# EAGLE board SparkFun_Temperatre_Sensor-STTS22H (EAGLE 9.6.2)
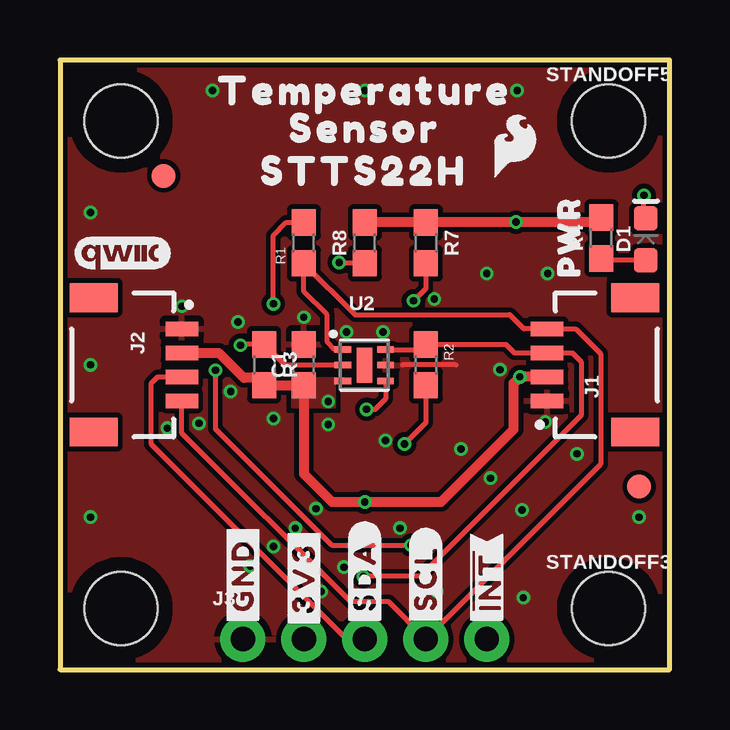
[diagram p0: board, top side]
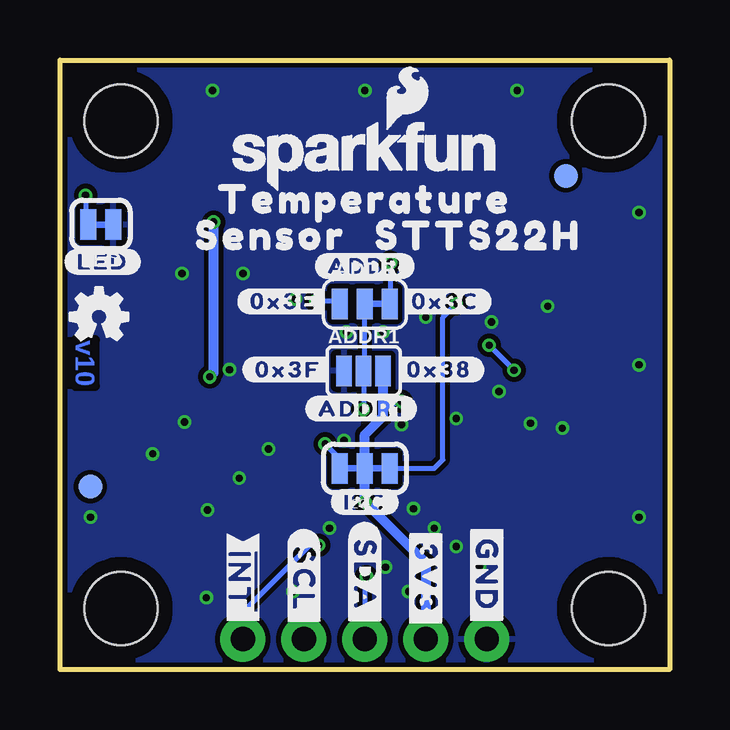
[diagram p1: board, bottom side, seen from below]

Size 25.4 x 25.4 mm. Coordinates in mm from the lower left corner, seen from the top.
Outline: 25.4,25.4 0,25.4 0,0 25.4,0 25.4,25.4
Copper layers (1*16): Top 0.035mm / dielectric 1.5mm / Bottom 0.035mm
Design rules "SparkFun-2-Layer-Minimum-JLCPCB": minimum track width 5mil, minimum drill 0.3mm, track to track 5mil, track to pad 5mil, pad to pad 5mil, via to via 5mil, smd to smd 5mil, copper to edge 7mil, drill to drill 7mil, minimum pad ring 5mil, minimum via ring 5mil, stop-mask expansion 2.5mil, vias tented up to drill 25mil, thermal gap 10mil

## Footprints (pad centres in the part's own frame; a part is rotated, then mirrored left to right if it is on the bottom)
SMT-JUMPER_3_1-NC_TRACE_SILK = smd 0.66 x 1.27: 1 -1.041,0; 2 0,0; 3 1.041,0
SMT-JUMPER_3_NO_SILK = smd 0.635 x 1.27: 1 -0.813,0; 2 0,0; 3 0.813,0
0603 = smd 1.1 x 1: 1 -0.85,0; 2 0.85,0
LED-0603 = smd 1 x 1: A -0.877,0; C 0.877,0
FIDUCIAL-1X2 = smd 1 x 1: 1 0,0
SMT-JUMPER_3_2-NC_TRACE_SILK = smd 0.66 x 1.27: 1 -1.041,0; 2 0,0; 3 1.041,0
JST04_1MM_RA = smd 0.6 x 1.35: 1 -1.5,0; 2 -0.5,0; 3 0.5,0; 4 1.5,0 | smd 1.2 x 2: NC1 2.8,-3.675; NC2 -2.8,-3.675
1X05_NO_SILK = drill 1.016 pad 1.88: 1 0,0; 2 2.54,0; 3 5.08,0; 4 7.62,0; 5 10.16,0
SMT-JUMPER_2_NC_TRACE_SILK = smd 0.66 x 1.27: 1 -0.521,0; 2 0.521,0
STAND-OFF-TIGHT = hole 3.048: 0,0
UDFN-6L = smd 0.7 x 0.27: P1 -0.916,0.634; P2 -0.916,-0.016; P3 -0.916,-0.666; P4 0.864,-0.666; P5 0.864,-0.016; P6 0.864,0.634 | smd 0.65 x 1.45: P7 -0.016,-0.016

## Placement (x,y rotation side)
ADDR  JUMPER-SMT_3_1-NC_TRACE_SILK  [SMT-JUMPER_3_1-NC_TRACE_SILK]  12.7,15.24 0 bottom
ADDR1  JUMPER-SMT_3_NO_SILK  [SMT-JUMPER_3_NO_SILK]  12.75,12.45 0 bottom
C1  0.1uF  [0603]  10.16,12.7 90 top
D1  RED  [LED-0603]  24.41,17.93 90 top
FD1  FIDUCIAL1X2  [FIDUCIAL-1X2]  4.32,20.57 0 bottom
FD2  FIDUCIAL1X2  [FIDUCIAL-1X2]  24.13,7.62 0 bottom
FD3  FIDUCIAL1X2  [FIDUCIAL-1X2]  4.32,20.57 0 top
FD4  FIDUCIAL1X2  [FIDUCIAL-1X2]  24.13,7.62 0 top
FRAME1  FRAME-LETTER  [CREATIVE_COMMONS]  -19.05,-16.51 0 top  (outside the outline)
I2C_PU  S_MODE  [SMT-JUMPER_3_2-NC_TRACE_SILK]  12.7,8.38 180 bottom
J1  QWIIC_RIGHT_ANGLE  [JST04_1MM_RA]  20.29,12.7 90 top
J2  QWIIC_RIGHT_ANGLE  [JST04_1MM_RA]  5.08,12.7 270 top
J3  [1X05_NO_SILK]  7.62,1.27 0 top
LED  JUMPER-SMT_2_NC_TRACE_SILK  [SMT-JUMPER_2_NC_TRACE_SILK]  23.7,18.54 180 bottom
LOGO2  OSHW-LOGOMINI  [OSHW-LOGO-MINI]  23.77,14.71 0 bottom
LOGO3  SFE_LOGO_NAME_FLAME.1_INCH  [SFE_LOGO_NAME_FLAME_.1]  12.66,21.41 0 bottom
LOGO4  QWIIC_LOGO_4MM  [QWIIC_4MM]  2.62,17.35 0 top
R1  2.2k  [0603]  10.16,17.78 90 top
R2  2.2k  [0603]  15.24,12.7 270 top
R3  10k  [0603]  8.51,12.7 270 top
R4  1k  [0603]  22.56,17.98 90 top
R7  56k  [0603]  15.24,17.78 270 top
R8  15k  [0603]  12.7,17.78 90 top
STANDOFF1  STAND-OFFTIGHT  [STAND-OFF-TIGHT]  2.54,22.86 0 top
STANDOFF2  STAND-OFFTIGHT  [STAND-OFF-TIGHT]  2.54,2.54 0 top
STANDOFF3  STAND-OFFTIGHT  [STAND-OFF-TIGHT]  22.86,2.54 0 top
STANDOFF5  STAND-OFFTIGHT  [STAND-OFF-TIGHT]  22.86,22.86 0 top
U2  STTS22H  [UDFN-6L]  12.7,12.7 0 top
U$1  [#GND#3]  7.62,3.94 90 top
U$2  [#3V3#4]  10.16,3.81 90 top
U$3  [#SDA#5]  12.7,3.94 90 top
U$4  [#SCL#4]  15.24,3.81 90 top
U$5  [#SDA#7]  12.7,3.91 270 bottom
U$6  [#ADDR#6]  12.7,16.81 0 bottom
U$7  [#SCL#6]  15.24,3.76 270 bottom
U$8  [#ADDR1#9]  12.85,10.87 0 bottom
U$9  [#GND#3]  7.62,3.94 270 bottom
U$10  [#3V3#4]  10.16,3.81 270 bottom
U$11  [##INT##9]  17.78,3.68 270 bottom
U$12  [#0X3C#25]  9.35,15.34 0 bottom
U$13  [#0X3E#25]  16.1,15.34 0 bottom
U$14  [#0X3F#25]  15.9,12.5 0 bottom
U$15  [#0X38#25]  9.6,12.5 0 bottom
U$16  [#LED#11]  23.62,16.99 0 bottom
U$17  [TEMPERATURE23]  12.7,19.61 0 bottom
U$18  [##INT##6]  17.78,3.68 90 top
U$19  [SENSOR24]  16.61,18.08 0 bottom
U$20  [SFE_LOGO_FLAME_.1]  18.95,21.84 0 top
U$21  [PWR9]  21.21,18.03 90 top
U$22  [STTS22H21]  7.98,18.08 0 bottom
U$23  [TEMPERATURE23]  12.7,24.13 0 top
U$24  [SENSOR24]  12.7,22.56 0 top
U$25  [#I2C#11]  12.7,6.99 0 bottom
U$26  [STTS22H21]  12.65,20.78 0 top

## Library data of the parts
ADDR ADDR1 I2C_PU LED = SparkFun-Jumpers
C1 = SparkFun-Capacitors; PROD_ID: CAP-00810
D1 = SparkFun-LED; PROD_ID: DIO-00819
FD1-FD4 LOGO2-LOGO4 U$20 = SparkFun-Aesthetics
FRAME1 = SparkFun-Aesthetics; DESIGNER: Elias Santistevan
J1 J2 = SparkFun-Connectors; PROD_ID: CONN-13694
J3 = SparkFun-Connectors
R1 R2 = SparkFun-Resistors; PROD_ID: RES-08272
R3 = SparkFun-Resistors; PROD_ID: RES-00824
R4 = SparkFun-Resistors; PROD_ID: RES-07856
R7 = SparkFun-Resistors
R8 = SparkFun-Resistors; PROD_ID: RES-07854
STANDOFF1-STANDOFF3 STANDOFF5 = SparkFun-Hardware
U2 = STTS22H; PROD_ID: IC-17235
U$1-U$10 U$12-U$15 U$17-U$19 U$21-U$24 U$26 = top
U$11 U$16 U$25 = bot

## Nets
3.3V: ADDR1.3 C1.1 I2C_PU.2 J1.2 J2.2 J3.2 R3.2 R4.2 R7.1 R8.2 U2.P3
!INT!: J3.5 R3.1 U2.P2
ADDR: ADDR1.2 ADDR.2 U2.P4
GND: ADDR1.1 C1.2 J1.1 J2.1 J3.1 LED.1 U2.P5
N$2: D1.A R4.1
N$3: D1.C LED.2
N$4: ADDR.3 R8.1
N$5: I2C_PU.1 R1.2
N$6: I2C_PU.3 R2.2
N$7: ADDR.1 R7.2
SCL: J1.4 J2.4 J3.4 R1.1 U2.P1
SDA: J1.3 J2.3 J3.3 R2.1 U2.P6

## Tracks (layer width: path | path; a pad name or v marks a point on that pad's centre or on a via)
3.3V  (via drill 0.3)
  Top 0.406: R3.2 8.47,11.81 | J2.2 6.61,13.2 7.66,12.15 8.2,12.15 R3.2 | J1.2 v19.16,12.2 18.9,11.94 18.9,10.01 15.88,6.99 v12.7,6.99 11.33,6.99 10.16,8.15 C1.1 R3.2 | R4.2 22.37,18.64 v19,18.64 18.99,18.63 R7.1 R8.2
  Bottom 0.406: 11.94,10.92 11.94,10.55 12.7,9.79 I2C_PU.2 v12.7,6.99 10.16,4.45 J3.2 | 11.94,10.92 11.94,11.43 | 11.94,11.43 ADDR1.3 | v19.16,12.2 19,12.36 v19,18.64 | 11.68,11.18 11.94,11.43 | v11.18,11.18 11.68,11.18 | 11.68,11.18 11.94,10.92
  pour Top (no thermals): 11.84,11.94 11.43,11.94 11.43,10.92 9.7,10.92 9.7,12.14 11.84,12.14
!INT!  (via drill 0.3)
  Top 0.203: U2.P2 11.43,12.68 9.38,12.68 R3.1 7.56,13.55 v7.52,13.51 | v6.48,12.47 6.48,10.03 11.33,5.18 v14.63,5.18
  Bottom 0.203: v7.52,13.51 v6.48,12.47 | J3.5 17.78,2.4 15.91,4.27 15.9,4.27 14.99,5.18 v14.63,5.18
ADDR  (via drill 0.3)
  Top 0.203: U2.P4 13.56,11.28 13.13,10.85 v12.78,10.85
  Bottom 0.203: ADDR.2 12.7,12.5 ADDR1.2 12.75,10.87 v12.78,10.85
GND  (via drill 0.3)
  Top 0.203: 16.51,12.7 14.28,12.7
  other vias: 16.71,9.19 20.22,10.31 5.08,15.14 14.17,5.89 4.47,10.06 7.11,11.58 8.89,10.46 10.16,14.68 15.6,15.44 21.54,8.99 24.13,6.35 19.3,3 1.27,6.35 1.27,12.7 1.27,19.05 6.35,24.13 19.05,24.13 12.7,24.13 11.84,4.27 12.75,5.84 7.42,14.48 5.79,10.26 7.92,4.32 19.25,6.65 15.7,3.25 13.56,9.55 18.34,12.5 11.18,10.21 10.87,3.25 8.89,5.13 13.46,14.07 11.94,14.07 10.67,6.71 9.8,5.89 17.93,7.98 20.32,16.51 17.78,16.51
  pour Top (isolate 0.203, rank 2): 25.4,0 25.4,25.4 0,25.4 0,0
  pour Bottom (isolate 0.203, rank 2): 0,0 0,25.4 25.4,25.4 25.4,0
N$2
  Top 0.203: D1.A 22.63,17.05 R4.1
N$3  (via drill 0.3)
  Top 0.203: D1.C 24.33,18.89 v24.33,19.76
  Bottom 0.203: v24.33,19.76 24.33,18.66 LED.2
N$4  (via drill 0.3)
  Top 0.203: 12.36,16.93 R8.1 11.67,16.93 v11.63,16.97
  Bottom 0.203: 11.53,15.37 ADDR.3 11.63,15.27 v11.63,16.97
N$5  (via drill 0.3)
  Top 0.203: v8.89,15.24 8.89,18.09 9.44,18.63 R1.2
  Bottom 0.203: 11.66,8.79 I2C_PU.1 9.8,8.38 9.45,8.74 9.45,14.68 v8.89,15.24
N$6  (via drill 0.3)
  Top 0.203: R2.2 15.24,10.29 v14.35,9.4
  Bottom 0.203: v14.35,9.4 13.74,8.79 I2C_PU.3
N$7  (via drill 0.3)
  Top 0.203: R7.2 15.24,15.88 v14.73,15.37
  Bottom 0.203: v14.73,15.37 13.87,15.37 ADDR.1
SCL
  Top 0.203: J2.4 5.08,9.86 12.12,2.82 13.69,2.82 J3.4 22.53,8.56 22.53,13.16 21.49,14.2 J1.4 19.33,14.2 18.75,14.78 | 18.75,14.78 18.73,14.8 | U2.P1 11.46,13.33 11.12,13.66 11.12,14.78 10.16,15.75 R1.1 10.16,16.92 12.29,14.78 18.75,14.78
SDA  (via drill 0.3)
  Top 0.203: U2.P6 15.24,13.33 15.46,13.55 R2.1 18.58,13.55 18.93,13.2 J1.3 21.34,13.2 21.72,12.83 21.72,10.59 15.01,3.89 12.65,3.89 v12.64,3.87 | J2.3 4.07,12.2 3.81,11.94 3.81,9.4 11.94,1.27 J3.3
  Bottom 0.203: v12.64,3.87 12.7,3.81 J3.3

## Text on the board
Bottom: v10
Measures: Units in Inches